# Altium PCB HLK_RM60_KIT_V1.1.PcbDoc (part 2 of 2)
Units mm, origin at the board's own origin, x right, y up, seen from the top; angles counter-clockwise.
Board outline 140 x 100 mm, 2 copper layers (Top, Bottom), stack 0.29 mm thick; 133 components, 198 nets, 607 pads, 989 vias.
Unrouted connection lines stored in the file: 4.
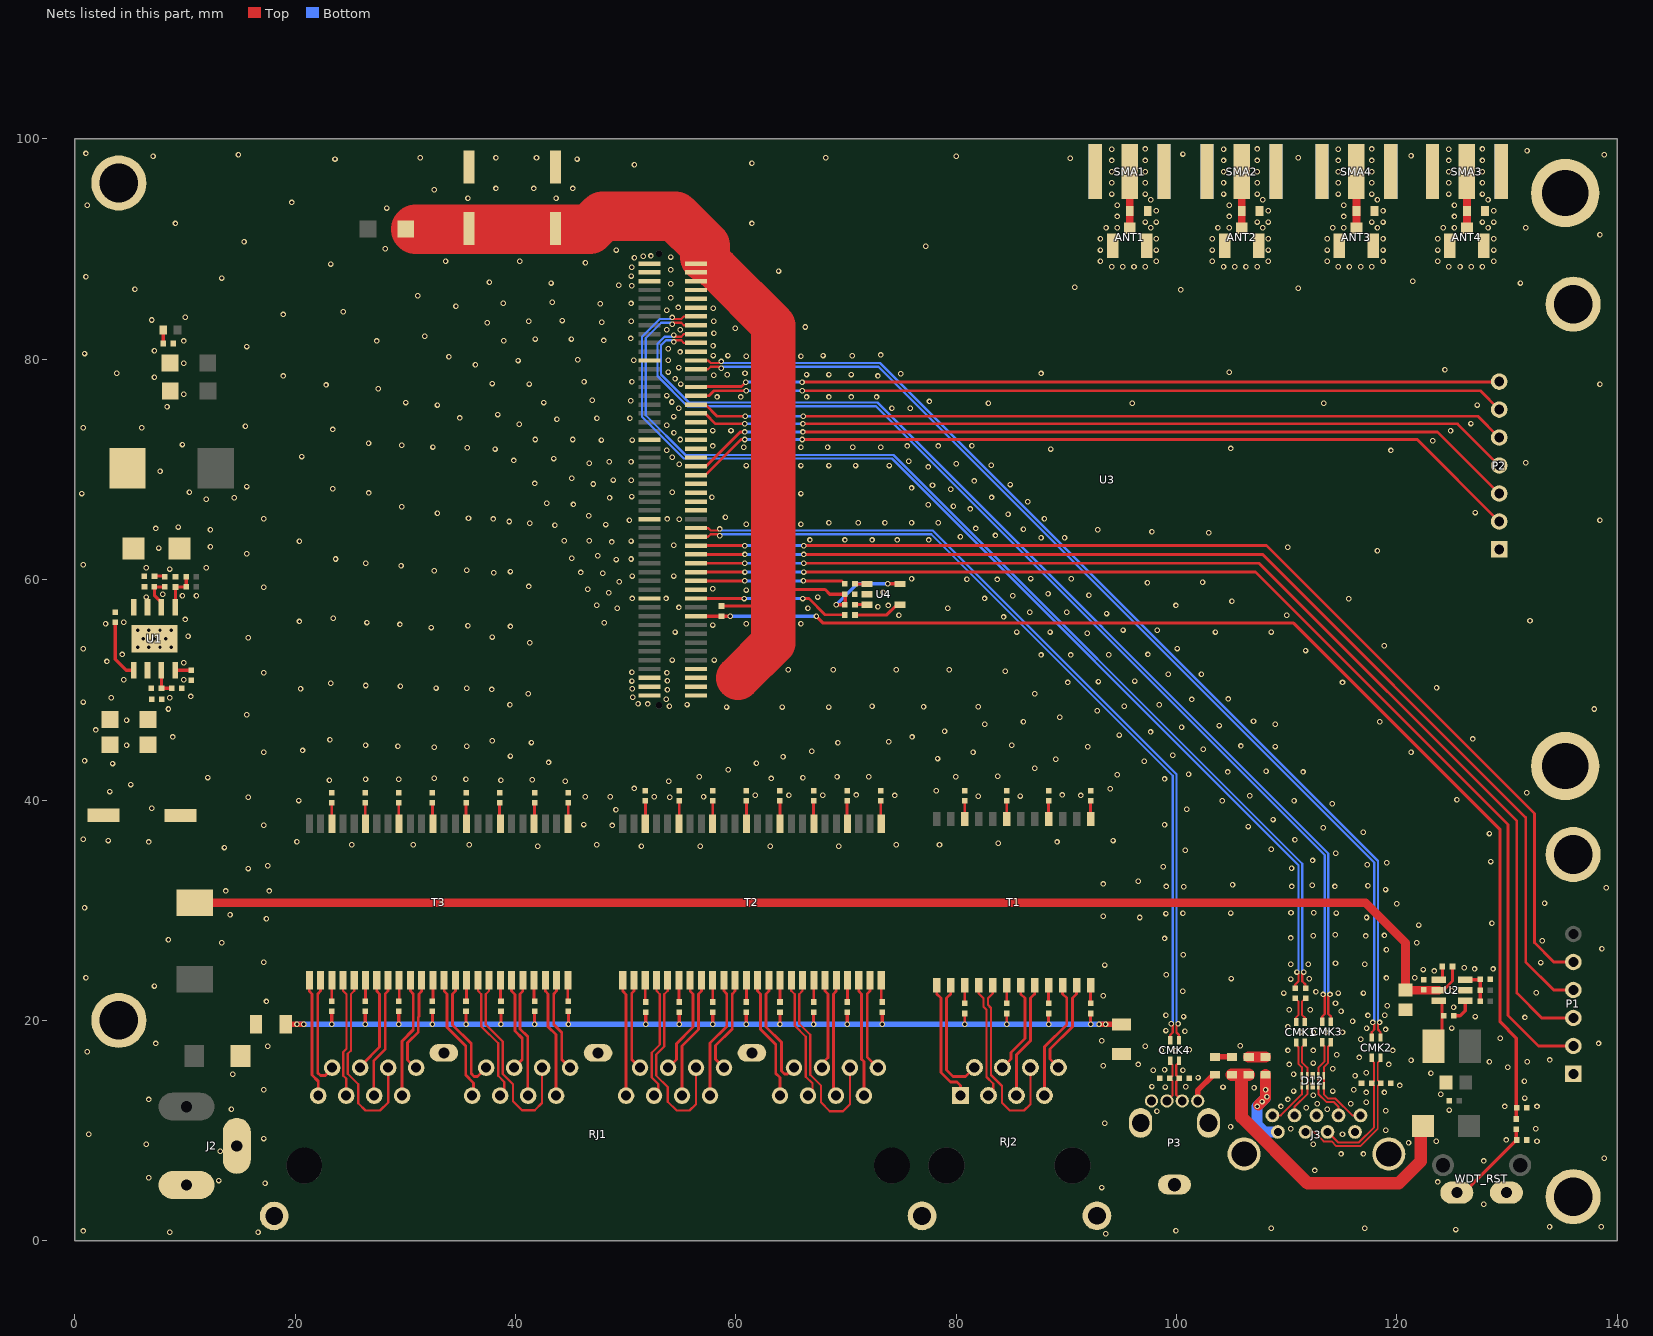
[diagram p2: the nets of this part, all layers, seen from the top]

## Via types
v1: diameter 0.5, hole 0.3, Top to Bottom, tented both sides, 989 vias

## Nets (pads, with @x,y where several pads share a name; then routed paths per layer and width w, separated by ;. In a path a pad name is that pad's centre, name@x,y a point inside that pad or via, vN(x,y) a via of type N, cw(c..) or ccw(c..) an arc to the next point about the centre after c; other vN are vias at no path point) (continued)
GND: ANT1.2 ANT1.3 ANT2.2 ANT2.3 ANT3.2 ANT3.3 ANT4.2 ANT4.3 C1.1 C2.1 C3.1 C4.1 C5.2 C6.1 C7.1 C8.1 C9.1 C10.1 C11.1 C12.1 C13.1 C14.1 C15.1 C16.1 C17.1 C18.1 C19.1 C20.1 C21.1 C22.2 C24.1 C25.1 C26.1 C27.2 C28.2 C29.2 C30.1 C33.1 C34.1 C35.2 C36.2 C38.1 C39.2 C41.1 C42.2 C45.1 D1.1 D3.1 D4.1 D6.1 D8.1 D9.1 D10.1 D11.1 D12.3 D12.8 D13.1 D14.1 D15.1 J2.2 J2.3 J3.4 J3.7 J3.10 J3.11 K1.0 K2.0 K3.0 K4.0 K5.0 P1.1 P2.1 P3.4 P3.5 P3.6 P3.7 R26.1 R27.1 R28.1 R29.2 R34.1 RJ1.EH RJ2.0 SMA1.2 SMA1.3 SMA2.2 SMA2.3 SMA3.2 SMA3.3 SMA4.2 SMA4.3 U1.7 U1.9 U2.2 U3.0@135.276,43.088 U3.0@135.276,95.088 U3.2 U3.4 U3.6 U3.11 U3.21 U3.24 U3.42 U3.60 U3.78 U3.96 U3.98 U3.100 U4.2 WDT_RST.1
  other v1: 93.574,0.635 8.636,0.762 16.637,0.762 0.762,0.889 99.949,0.914 125.349,1.016 108.585,1.143 117.094,1.143 133.858,1.27 138.557,1.27 127.889,3.302 93.218,4.826 17.272,5.207 123.698,5.334 13.081,5.461 6.731,5.715 112.547,6.375 127.889,7.239 138.811,7.493 114.935,7.874 116.967,7.874 13.208,8.128 6.477,8.763 112.395,8.763 121.056,8.89 123.571,9.017 132.715,9.017 129.921,9.144 17.145,9.271 1.27,9.652 115.062,9.652 118.999,10.033 110.363,10.16 132.588,10.16 104.902,10.338 93.472,10.668 98.222,11.76 118.999,11.811 124.739,11.862 14.224,11.938 113.665,11.938 111.76,12.065 109.474,12.192 129.794,12.192 132.715,12.192 112.776,12.446 115.824,12.446 117.221,12.573 6.731,12.827 110.109,12.827 131.597,12.954 112.395,13.208 123.977,13.284 117.221,13.462 118.872,13.462 110.617,13.589 114.173,13.589 17.145,13.716 116.078,13.716 107.036,13.894 98.984,13.945 104.216,13.945 100.838,13.97 97.765,13.995 120.269,14.097 131.572,14.478 101.956,14.808 116.205,14.986 14.351,15.113 110.617,15.113 123.088,15.189 117.221,15.24 97.892,15.469 100.584,15.469 98.908,15.519 114.173,15.621 130.048,15.748 93.345,15.875 96.52,16.002 110.236,16.002 119.253,16.002 112.395,16.129 128.397,16.256 131.826,16.256 121.285,16.383 133.883,16.408 116.586,16.637 114.554,16.891 1.143,17.145 99.873,17.247 110.109,17.272 112.395,17.272 119.634,17.272 98.603,17.297 101.168,17.323 17.526,17.653 97.155,17.653 105.791,17.704 7.366,17.907 138.303,17.907 93.218,18.161 116.713,18.288 129.388,18.364 111.252,18.923 112.395,18.923 113.538,18.923 115.062,18.923 100.762,19.025 99.035,19.075 118.974,19.177 117.246,19.279 124.968,19.304 110.109,19.431 115.976,19.914 131.623,20.269 100.635,20.345 127.102,20.345 117.373,20.447 99.035,20.472 118.897,20.472 114.935,20.828 110.236,20.955 112.141,20.955 125.141,21.183 119.126,21.336 114.427,21.565 17.399,21.717 93.345,22.225 109.728,22.479 114.681,22.479 116.967,22.479 132.639,22.504 112.649,22.606 100.559,22.631 124.991,22.708 7.239,23.114 110.363,23.749 112.039,23.774 104.953,23.8 119.05,23.851 1.016,23.876 121.615,23.876 99.06,24.13 123.393,24.486 122.403,24.613 127.051,24.663 128.727,24.663 126.111,24.765 93.472,25.019 110.363,25.095 111.963,25.095 117.069,25.095 114.427,25.197 133.045,25.248 17.145,25.273 100.609,25.959 119.05,26.416 138.608,26.492 13.335,27.051 121.793,27.051 133.198,27.229 8.509,27.305 98.908,27.432 110.363,27.483 117.17,27.661 112.395,27.686 118.872,27.711 114.402,27.762 121.996,28.651 128.626,28.804 17.399,29.21 96.647,29.337 117.246,29.337 93.345,29.464 14.097,29.591 99.035,29.693 100.584,29.718 104.927,29.743 114.503,29.743 110.388,29.769 112.446,29.769 0.889,30.226 119.99,30.582 133.401,30.632 13.716,31.75 17.653,31.75 118.974,31.877 138.989,32.029 100.66,32.131 99.06,32.156 110.465,32.156 114.376,32.156 117.373,32.207 112.319,32.258 105.08,32.309 93.345,32.385 96.52,32.639 15.748,33.782 110.439,33.807 98.806,33.934 17.526,34.036 117.297,34.138 119.075,34.315 128.524,34.417 112.344,34.519 114.452,35.179 100.787,35.433 108.585,35.535 13.589,35.687 42.037,35.814 51.435,35.814 56.769,35.814 63.119,35.814 69.342,35.814 25.146,35.941 30.734,35.941 35.814,35.941 47.371,35.941 74.549,35.941 78.486,35.941 83.82,36.068 6.731,36.195 89.154,36.195 20.168,36.22 3.048,36.322 94.234,36.322 110.744,36.398 0.762,36.449 128.397,36.957 116.942,37.084 113.309,37.49 106.502,37.592 48.793,37.694 17.145,37.719 98.908,37.744 46.203,37.77 108.763,38.227 49.124,39.116 100.94,39.167 6.985,39.243 114.122,39.649 104.14,39.929 110.668,39.929 20.345,39.954 125.451,40.03 15.748,40.259 54,40.259 48.616,40.284 52.603,40.284 46.33,40.31 57.074,40.31 82.017,40.335 85.827,40.361 106.655,40.386 74.422,40.411 91.313,40.411 61.773,40.437 64.821,40.437 67.894,40.437 70.917,40.462 89.637,40.462 131.775,40.665 3.175,40.767 78.181,40.843 93.98,41.021 50.775,41.046 5.08,41.402 44.526,41.707 53.924,41.707 23.114,41.783 38.684,41.783 41.529,41.834 26.391,41.885 29.413,41.885 35.509,41.885 98.908,41.91 63.221,41.961 32.639,41.986 66.091,42.012 12.065,42.037 56.667,42.113 69.19,42.113 72.06,42.113 79.959,42.113 83.769,42.164 94.615,42.291 101.092,42.342 104.648,42.545 111.481,42.545 108.128,42.621 59.309,42.748 87.122,42.875 3.429,43.307 61.874,43.332 43.002,43.409 97.079,43.51 0.889,43.561 89.027,43.688 78.308,43.764 64.287,43.917 39.548,43.993 99.644,44.069 17.145,44.323 121.285,44.323 81.534,44.348 66.904,44.425 20.676,44.501 102.413,44.602 32.639,44.78 91.948,44.831 108.966,44.856 29.337,44.882 35.585,44.882 105.842,44.907 4.699,44.958 26.391,44.958 85.039,44.958 69.266,45.187 41.453,45.212 73.889,45.288 37.897,45.39 23.165,45.466 126.873,45.542 8.89,45.72 75.997,45.72 94.793,45.898 97.638,46.177 78.943,46.253 1.905,46.355 100.457,46.609 103.886,46.761 108.966,46.863 82.601,46.888 86.106,47.092 118.44,47.117 106.985,47.142 4.699,47.244 89.408,47.498 15.621,47.752 92.812,48.108 8.509,48.26 137.922,48.26 59.157,48.438 64.211,48.438 68.428,48.438 77.038,48.463 81.991,48.463 53.975,48.514 72.365,48.514 95.25,48.514 39.497,48.641 98.425,48.641 55.575,48.666 52.019,48.717 51.13,48.743 0.762,48.895 101.371,49.124 53.696,49.149 104.699,49.174 3.302,49.276 8.636,49.276 50.648,49.327 10.541,49.403 41.173,49.632 87.122,49.657 53.797,50.013 37.846,50.038 20.498,50.089 50.597,50.089 35.585,50.14 32.791,50.165 123.596,50.19 29.566,50.317 26.416,50.394 23.241,50.597 90.119,50.673 115.062,50.673 92.913,50.749 50.571,50.8 96.215,50.8 53.797,50.825 4.445,50.927 9.906,50.927 99.238,51.41 102.26,51.41 17.145,51.562 53.746,51.562 50.571,51.587 84.455,51.689 64.77,51.816 68.834,51.816 74.549,51.816 79.375,51.816 9.906,52.451 2.921,52.578 54.229,52.705 58.039,52.705 87.706,53.162 90.399,53.162 93.853,53.188 4.318,53.213 97.409,53.213 111.709,53.569 0.762,53.721 100.076,53.746 118.847,54 41.3,54.28 15.748,54.737 37.897,54.788 10.287,54.864 91.897,55.143 54.483,55.245 85.496,55.245 88.519,55.245 103.53,55.245 108.585,55.245 98.247,55.397 95.148,55.423 32.36,55.651 39.548,55.753 35.687,55.804 57.912,55.88 29.515,55.931 2.794,56.007 60.96,56.007 65.913,56.007 48.057,56.083 26.518,56.109 4.445,56.134 20.396,56.21 132.08,56.261 10.033,56.388 23.47,56.49 84.303,56.617 74.803,56.769 110.007,56.769 93.65,56.921 86.665,57.048 90.043,57.048 49.251,57.404 66.548,57.404 79.223,57.404 54.839,57.48 72.898,57.531 73.838,57.658 99.949,57.658 47.371,57.683 105.029,58.039 115.621,58.268 50.597,58.293 53.67,58.293 82.575,58.293 6.477,58.42 67.437,58.42 9.779,58.547 11.049,58.547 85.141,58.547 92.05,58.598 8.001,58.674 88.341,58.725 48.463,58.801 73.355,58.852 60.96,59.055 46.558,59.131 57.912,59.182 17.145,59.309 41.199,59.385 97.358,59.715 102.362,59.766 49.428,59.817 83.718,60.02 80.975,60.046 75.946,60.071 90.449,60.071 86.766,60.096 50.597,60.325 54.356,60.325 47.93,60.579 38.024,60.63 45.923,60.655 39.548,60.731 32.639,60.808 35.585,60.858 8.636,60.96 6.477,61.087 11.938,61.087 29.616,61.265 0.762,61.341 26.416,61.493 49.149,61.824 23.673,61.874 50.495,61.874 45.11,61.951 47.473,62.179 15.621,62.357 118.237,62.611 7.62,62.865 110.084,62.941 12.319,62.992 54.356,63.119 48.743,63.424 20.396,63.475 50.495,63.5 44.425,63.525 46.685,63.525 66.726,63.602 69.901,63.602 72.365,63.602 74.651,63.602 77.521,63.602 87.706,63.805 89.84,63.805 80.391,63.881 83.566,64.008 102.921,64.262 97.765,64.338 12.319,64.516 92.862,64.541 86.106,64.567 7.366,64.643 81.788,64.643 9.398,64.77 43.586,64.948 48.184,64.999 60.96,65.024 65.913,65.024 41.3,65.126 68.453,65.151 71.12,65.151 73.533,65.151 75.946,65.151 78.359,65.151 39.446,65.278 50.343,65.38 138.43,65.405 54.864,65.481 37.973,65.507 53.772,65.507 17.145,65.532 88.011,65.532 35.738,65.583 59.055,65.659 46.66,65.786 84.709,65.938 32.918,66.015 127.102,66.091 81.28,66.421 29.667,66.624 79.756,66.675 77.47,66.802 45.263,66.827 42.85,66.929 86.487,67.081 11.938,67.31 14.478,67.437 48.539,67.437 83.21,67.462 57.836,67.488 50.546,67.539 0.635,67.818 65.913,67.818 26.695,67.869 10.414,67.945 54.229,67.945 79.502,68.199 23.419,68.25 75.946,68.326 15.621,68.453 77.851,68.58 84.912,68.631 47.066,68.682 41.758,68.732 81.636,68.961 50.521,69.012 48.87,69.037 45.11,69.19 7.747,69.85 77.47,70.231 60.96,70.358 65.913,70.358 68.453,70.358 70.866,70.358 73.914,70.358 83.185,70.383 54.864,70.485 80.01,70.51 46.685,70.561 131.699,70.612 48.514,70.714 50.495,70.714 75.692,70.739 39.853,70.815 43.485,70.993 54.229,71.12 20.599,71.171 119.456,71.73 53.721,71.755 38.151,71.857 88.57,71.857 104.927,71.907 35.636,71.984 60.706,72.009 65.913,72.009 68.326,72.009 70.612,72.009 73.152,72.009 32.512,72.034 57.912,72.136 75.565,72.136 78.384,72.136 81.432,72.161 29.693,72.212 9.779,72.263 26.67,72.39 123.241,72.593 47.803,72.669 50.597,72.669 41.808,72.72 45.187,72.72 54.966,72.72 54.381,73.33 124.866,73.508 57.912,73.533 59.563,73.533 23.419,73.635 0.762,73.787 6.096,73.787 15.494,73.914 53.721,74.016 40.335,74.117 126.721,74.168 43.764,74.549 47.396,74.651 50.394,74.651 34.95,74.676 54.356,74.803 38.379,74.981 54.813,75.565 74.168,75.565 75.819,75.565 8.382,75.692 32.918,75.844 127.305,75.844 82.931,76.022 95.987,76.022 113.36,76.022 30.048,76.073 42.57,76.073 54.204,76.124 77.572,76.175 50.47,76.225 46.965,76.276 58.293,76.581 60.452,76.581 66.421,76.581 68.453,76.581 70.485,76.581 72.771,76.581 53.721,76.708 9.906,76.835 27.534,77.318 22.809,77.673 138.43,77.724 41.25,77.749 54.991,77.749 37.897,77.8 46.228,77.953 50.571,77.953 54.483,78.232 7.239,78.359 18.923,78.486 72.898,78.486 57.988,78.562 59.233,78.588 66.421,78.613 68.453,78.613 70.485,78.613 74.981,78.689 87.706,78.715 3.81,78.74 60.833,78.74 104.775,78.816 53.873,78.842 124.358,79.045 54.813,79.248 36.373,79.502 9.906,79.629 40.234,79.883 50.749,79.908 53.873,79.908 45.644,79.959 33.96,80.239 60.96,80.264 65.913,80.264 70.561,80.315 57.963,80.34 59.284,80.34 67.92,80.34 73.152,80.391 0.889,80.518 54.94,80.67 7.239,80.772 53.873,80.95 15.621,81.153 57.937,81.229 9.906,81.661 27.407,81.661 38.938,81.686 48.006,81.712 41.808,81.839 45.085,81.839 50.47,81.89 31.775,82.093 58.014,82.372 53.721,82.677 54.966,82.677 59.944,82.804 66.294,82.931 37.44,83.312 47.828,83.363 41.199,83.439 57.988,83.439 50.521,83.464 44.247,83.515 6.985,83.566 10.033,83.82 18.923,84.074 24.384,84.328 53.721,84.455 57.963,84.633 54.788,84.709 34.595,84.811 47.701,85.039 50.495,85.065 38.887,85.09 43.332,85.166 54.102,85.598 31.14,85.776 100.381,86.309 5.461,86.36 111.049,86.436 90.754,86.538 50.546,86.665 49.378,86.716 54.102,86.868 43.231,86.919 131.216,86.919 37.643,86.995 121.437,87.071 13.335,87.376 1.016,87.503 50.521,87.554 63.881,88.011 54.102,88.138 50.546,88.367 94.107,88.392 95.123,88.392 96.139,88.392 97.155,88.392 104.267,88.392 105.283,88.392 106.299,88.392 107.315,88.392 114.681,88.392 115.697,88.392 116.713,88.392 117.729,88.392 124.714,88.392 125.73,88.392 126.746,88.392 127.762,88.392 23.241,88.646 46.355,88.773 33.655,88.9 40.386,88.9 93.091,88.9 98.171,88.9 103.251,88.9 108.331,88.9 113.665,88.9 118.745,88.9 123.698,88.9 128.778,88.9 50.8,89.205 54.102,89.281 51.587,89.357 52.299,89.383 49.149,89.916 93.091,89.916 98.171,89.916 103.251,89.916 108.331,89.916 113.665,89.916 118.745,89.916 123.698,89.916 128.778,89.916 28.194,90.043 77.241,90.246 15.367,90.678 93.091,90.932 98.171,90.932 103.251,90.932 108.331,90.932 113.665,90.932 118.745,90.932 123.698,90.932 128.778,90.932 138.43,91.313 93.599,91.948 94.615,91.948 97.663,91.948 103.759,91.948 104.775,91.948 107.823,91.948 114.173,91.948 115.189,91.948 118.237,91.948 124.206,91.948 125.222,91.948 128.27,91.948 131.699,91.948 9.144,92.329 61.468,92.329 97.155,92.456 98.171,92.456 107.315,92.456 108.331,92.456 117.729,92.456 118.745,92.456 127.762,92.456 128.778,92.456 94.615,92.964 104.775,92.964 115.189,92.964 125.222,92.964 98.171,93.472 108.331,93.472 118.745,93.472 128.778,93.472 28.321,93.726 1.143,93.98 94.615,93.98 104.775,93.98 115.189,93.98 125.222,93.98 19.685,94.234 97.663,94.488 107.823,94.488 118.237,94.488 128.27,94.488 35.687,94.615 43.688,94.615 94.107,94.996 97.155,94.996 104.267,94.996 107.315,94.996 114.681,94.996 117.729,94.996 124.714,94.996 127.762,94.996 32.639,95.377 38.227,95.504 41.656,95.504 45.212,95.504 94.107,96.012 97.155,96.012 104.267,96.012 107.315,96.012 114.681,96.012 117.729,96.012 124.714,96.012 127.762,96.012 94.107,97.028 97.155,97.028 104.267,97.028 107.315,97.028 114.681,97.028 117.729,97.028 124.714,97.028 127.762,97.028 50.8,97.663 61.468,97.79 94.107,98.044 97.155,98.044 104.267,98.044 107.315,98.044 114.681,98.044 117.729,98.044 124.714,98.044 127.762,98.044 23.622,98.171 45.593,98.171 90.348,98.247 31.369,98.298 38.227,98.298 41.91,98.298 68.174,98.298 111.049,98.298 7.112,98.425 80.01,98.425 121.285,98.476 14.859,98.552 138.811,98.552 100.584,98.628 1.016,98.679 131.81,98.933 94.107,99.06 104.267,99.06 114.681,99.06 124.714,99.06 97.155,99.088 107.315,99.088 117.729,99.088 127.762,99.088
I2C_SCLK: U3.75
I2C_SDA: R31.1 U3.77 | length 14.1
  Top w0.254: U3.77@56.376,58.288 v1(60.762,58.288) ; v1(66.086,58.288) 66.629,58.288 68.097,56.82 R31.1@69.875,56.82
  Bottom w0.254: v1(60.762,58.288) v1(66.086,58.288)
MTXVN_A: RJ2.2 T1.14 | length 11
  Top w0.254: T1.14@79.502,23.184 79.502,22.407 79.121,22.026 79.121,15.494 79.705,14.91 80.849,14.91 RJ2.2@81.661,15.722
MTXVN_A_P0: RJ1.A2 T3.26 | length 10.3
  Top w0.254: T3.26@22.31,23.634 22.31,22.657 22.054,22.401 22.054,15.24 22.308,14.986 22.733,14.986 23.368,15.621 RJ1.A2@23.368,15.707
MTXVN_A_P1: RJ1.B2 T3.38 | length 11.1
  Top w0.254: T3.38@34.55,23.634 34.55,22.657 34.294,22.401 34.294,19.583 35.992,17.886 35.992,15.164 36.236,14.92 36.551,14.92 RJ1.B2@37.338,15.707
MTXVN_A_P2: RJ1.C2 T2.26 | length 8.3
  Top w0.254: T2.26@50.758,23.634 50.758,22.657 50.546,22.445 50.546,16.469 RJ1.C2@51.308,15.707
MTXVN_A_P3: RJ1.D2 T2.38 | length 10.4
  Top w0.254: T2.38@62.998,23.634 62.998,22.657 62.742,22.401 62.742,19.406 64.135,18.013 64.135,15.4 64.412,15.123 64.694,15.123 RJ1.D2@65.278,15.707
MTXVN_B: RJ2.6 T1.17 | length 17.8
  Top w0.203: T1.17@83.312,23.184 83.312,22.432 82.88,22.001 82.88,21.412 83.16,21.133 83.16,15.037 84.15,14.046 84.15,12.522 84.861,11.811 86.157,11.811 86.741,12.395 RJ2.6@86.741,15.722
MTXVN_B_P0: RJ1.A6 T3.29 | length 18.3
  Top w0.203: T3.29@25.37,23.634 25.37,22.682 25.063,22.376 25.063,17.249 24.778,16.965 24.778,15.15 25.73,14.199 25.73,12.471 26.391,11.811 27.711,11.811 28.448,12.548 RJ1.A6@28.448,15.707
MTXVN_B_P1: RJ1.B6 T3.41 | length 18.6
  Top w0.203: T3.41@37.61,23.634 37.61,22.682 37.303,22.376 37.303,19.618 38.837,18.085 38.837,15.138 39.776,14.199 39.776,12.649 40.589,11.836 41.758,11.836 42.418,12.497 RJ1.B6@42.418,15.707
MTXVN_B_P2: RJ1.C6 T2.29 | length 18.3
  Top w0.203: T2.29@53.818,23.634 53.818,22.682 53.511,22.376 53.511,17.63 52.781,16.9 52.781,14.986 53.823,13.945 53.823,12.624 54.635,11.811 55.804,11.811 56.388,12.395 RJ1.C6@56.388,15.707
MTXVN_B_P3: RJ1.D6 T2.41 | length 18.6
  Top w0.203: T2.41@66.058,23.634 66.058,22.682 65.751,22.376 65.751,19.694 66.751,18.694 66.751,15.062 67.742,14.072 67.742,12.548 68.529,11.76 69.723,11.76 70.358,12.395 RJ1.D6@70.358,15.707
MTXVN_C: RJ2.5 T1.20 | length 10.7
  Top w0.254: RJ2.5@85.471,13.182 85.471,16.884 86.741,18.154 86.741,22.026 87.122,22.407 T1.20@87.122,23.184
MTXVN_C_P0: RJ1.A5 T3.32 | length 11
  Top w0.254: RJ1.A5@27.178,13.167 27.131,13.214 27.131,16.329 28.174,17.372 28.174,22.401 28.43,22.657 T3.32@28.43,23.634
MTXVN_C_P1: RJ1.B5 T3.44 | length 10.9
  Top w0.254: T3.44@40.67,23.634 40.67,22.657 40.414,22.401 40.414,19.225 41.123,18.517 41.123,13.192 RJ1.B5@41.148,13.167
MTXVN_C_P2: RJ1.C5 T2.32 | length 11.2
  Top w0.254: RJ1.C5@55.118,13.167 55.118,17.671 56.622,19.175 56.622,22.401 56.878,22.657 T2.32@56.878,23.634
MTXVN_C_P3: RJ1.D5 T2.44 | length 10.7
  Top w0.254: RJ1.D5@69.088,13.167 68.862,13.393 68.862,22.401 69.118,22.657 T2.44@69.118,23.634
MTXVN_D: RJ2.8 T1.23 | length 8.8
  Top w0.254: RJ2.8@89.281,15.722 88.519,16.484 88.519,17.392 90.551,19.424 90.551,22.026 90.932,22.407 T1.23@90.932,23.184
MTXVN_D_P0: RJ1.A8 T3.35 | length 8.8
  Top w0.254: RJ1.A8@30.988,15.707 30.902,15.707 30.201,16.408 30.201,17.972 31.183,18.954 31.183,20.287 31.234,20.338 31.234,22.401 31.49,22.657 T3.35@31.49,23.634
MTXVN_D_P1: RJ1.B8 T3.47 | length 8.7
  Top w0.254: T3.47@43.73,23.634 43.73,22.657 43.474,22.401 43.474,19.634 44.196,18.912 44.196,16.434 44.923,15.707 RJ1.B8@44.958,15.707
MTXVN_D_P2: RJ1.C8 T2.35 | length 9
  Top w0.254: RJ1.C8@58.928,15.707 58.166,16.469 58.166,17.722 59.682,19.238 59.682,22.401 59.938,22.657 T2.35@59.938,23.634
MTXVN_D_P3: RJ1.D8 T2.47 | length 8.4
  Top w0.254: T2.47@72.178,23.634 72.178,22.657 71.922,22.401 71.922,16.683 RJ1.D8@72.898,15.707
MTXVP_A: RJ2.1 T1.13 | length 11.2
  Top w0.254: T1.13@78.232,23.184 78.232,22.407 78.613,22.026 78.613,15.284 79.495,14.402 80.086,14.402 80.391,14.097 RJ2.1@80.391,13.182
MTXVP_A_P0: RJ1.A1 T3.25 | length 10.8
  Top w0.254: T3.25@21.29,23.634 21.29,22.657 21.546,22.401 21.546,15.03 22.098,14.478 RJ1.A1@22.098,13.167
MTXVP_A_P1: RJ1.B1 T3.37 | length 11.6
  Top w0.254: T3.37@33.53,23.634 33.53,22.657 33.786,22.401 33.786,19.373 35.484,17.675 35.484,15.03 36.191,14.322 36.191,13.29 RJ1.B1@36.068,13.167
MTXVP_A_P2: RJ1.C1 T2.25 | length 10.6
  Top w0.254: T2.25@49.738,23.634 49.738,22.657 50.038,22.357 RJ1.C1@50.038,13.167
MTXVP_A_P3: RJ1.D1 T2.37 | length 11.3
  Top w0.254: T2.37@61.978,23.634 61.978,22.657 62.234,22.401 62.234,19.195 63.627,17.802 63.627,15.189 64.008,14.808 RJ1.D1@64.008,13.167
MTXVP_B: RJ2.3 T1.16 | length 10.5
  Top w0.203: T1.16@82.042,23.184 82.042,22.432 82.474,22.001 82.474,21.244 82.753,20.964 82.753,14.868 83.363,14.259 RJ2.3@83.363,13.259
MTXVP_B_P0: RJ1.A3 T3.28 | length 10.8
  Top w0.203: T3.28@24.35,23.634 24.35,22.682 24.657,22.376 24.657,17.418 24.372,17.133 24.372,14.982 24.638,14.716 RJ1.A3@24.638,13.167
MTXVP_B_P1: RJ1.B3 T3.40 | length 11
  Top w0.203: T3.40@36.59,23.634 36.59,22.682 36.897,22.376 36.897,19.45 38.43,17.916 38.43,14.97 38.989,14.411 RJ1.B3@38.989,13.665
MTXVP_B_P2: RJ1.C3 T2.28 | length 10.7
  Top w0.203: T2.28@52.798,23.634 52.798,22.682 53.105,22.376 53.105,17.799 52.375,17.069 52.375,14.818 52.959,14.233 RJ1.C3@52.959,13.564
MTXVP_B_P3: RJ1.D3 T2.40 | length 11.2
  Top w0.203: T2.40@65.038,23.634 65.038,22.682 65.345,22.376 65.345,19.526 66.345,18.526 66.345,14.894 66.954,14.284 RJ1.D3@66.954,13.233
MTXVP_C: RJ2.4 T1.19 | length 8.5
  Top w0.254: RJ2.4@84.201,15.722 84.963,16.484 84.963,17.094 86.233,18.364 86.233,22.026 85.852,22.407 T1.19@85.852,23.184
MTXVP_C_P0: RJ1.A4 T3.31 | length 8.3
  Top w0.254: RJ1.A4@26.149,16.065 27.666,17.582 27.666,22.401 27.41,22.657 T3.31@27.41,23.634
MTXVP_C_P1: RJ1.B4 T3.43 | length 8.6
  Top w0.254: T3.43@39.65,23.634 39.65,22.657 39.957,22.35 39.957,19.036 40.615,18.378 40.615,16.444 RJ1.B4@39.878,15.707
MTXVP_C_P2: RJ1.C4 T2.31 | length 9
  Top w0.254: RJ1.C4@53.848,15.707 53.865,15.707 54.61,16.452 54.61,17.882 56.114,19.386 56.114,22.401 55.858,22.657 T2.31@55.858,23.634
MTXVP_C_P3: RJ1.D4 T2.43 | length 8.3
  Top w0.254: RJ1.D4@67.818,15.707 67.818,16.078 68.354,16.614 68.354,22.401 68.098,22.657 T2.43@68.098,23.634
MTXVP_D: RJ2.7 T1.22 | length 11
  Top w0.254: RJ2.7@88.011,13.182 88.011,17.602 90.043,19.634 90.043,22.026 89.662,22.407 T1.22@89.662,23.184
MTXVP_D_P0: RJ1.A7 T3.34 | length 11
  Top w0.254: RJ1.A7@29.718,13.167 29.693,13.192 29.693,18.11 30.726,19.144 30.726,22.401 30.47,22.657 T3.34@30.47,23.634
MTXVP_D_P1: RJ1.B7 T3.46 | length 10.9
  Top w0.254: T3.46@42.71,23.634 42.71,22.657 42.966,22.401 42.966,19.424 43.688,18.702 RJ1.B7@43.688,13.167
MTXVP_D_P2: RJ1.C7 T2.34 | length 11.2
  Top w0.254: RJ1.C7@57.658,13.167 57.658,17.932 59.174,19.448 59.174,22.401 58.918,22.657 T2.34@58.918,23.634
MTXVP_D_P3: RJ1.D7 T2.46 | length 10.7
  Top w0.254: T2.46@71.158,23.634 71.158,22.657 71.414,22.401 71.414,16.473 71.628,16.259 RJ1.D7@71.628,13.167
ND_ALE: U3.57
ND_CLE: U3.53
ND_CS_N: P2.2 U3.49 | length 77.3
  Top w0.254: U3.49@56.376,69.488 57.245,69.488 60.477,72.72 v1(60.808,72.72) ; v1(66.04,72.72) 121.844,72.72 P2.2@129.235,65.329
  Bottom w0.254: v1(60.808,72.72) v1(66.04,72.72)
ND_D0: U3.43
ND_D1: U3.41
ND_D2: U3.39
ND_D3: U3.37
ND_D4: P2.4 U3.35 | length 74.8
  Top w0.254: U3.35@56.376,75.088 57.221,75.088 58.166,74.143 v1(60.808,74.143) ; v1@66.116,74.168 v1(66.091,74.143) 125.501,74.143 P2.4@129.235,70.409
  Bottom w0.254: v1(60.808,74.143) v1(66.091,74.143)
ND_D5: P2.5 U3.33 | length 74.1
  Top w0.254: U3.33@56.376,75.888 57.233,75.888 58.293,74.828 v1(60.858,74.828) ; v1(66.116,74.828) 127.356,74.828 P2.5@129.235,72.949
  Bottom w0.254: v1(60.858,74.828) v1(66.116,74.828)
ND_D6: P2.6 U3.31 | length 73.7
  Top w0.254: U3.31@56.376,76.688 57.562,76.688 58.014,77.14 v1(60.935,77.14) ; v1(66.04,77.14) 127.584,77.14 P2.6@129.235,75.489
  Bottom w0.254: v1(60.935,77.14) v1(66.04,77.14)
ND_D7: P2.7 U3.29 | length 72.9
  Top w0.254: U3.29@56.376,77.488 56.376,77.521 60.503,77.521 v1(60.909,77.927) ; v1(66.015,77.927) P2.7@129.083,77.927
  Bottom w0.254: v1(60.909,77.927) v1(66.015,77.927)
ND_RB_N: U3.45
ND_RE_N: P2.3 U3.47 | length 76.4
  Top w0.254: U3.47@56.376,70.288 57.283,70.288 60.401,73.406 v1(60.808,73.406) ; v1(66.091,73.406) 123.698,73.406 P2.3@129.235,67.869
  Bottom w0.254: v1(60.808,73.406) v1(66.091,73.406)
ND_WE_N: U3.55
ND_WP: U3.51
NetANT1_1: ANT1.1 D6.2 SMA1.1 | length 5.1
  Top w0.7: SMA1.1@95.742,97.028 95.758,97.012 D6.2@95.758,93.472 ANT1.1@95.758,91.897
NetANT2_1: ANT2.1 D11.2 SMA2.1 | length 5.1
  Top w0.7: SMA2.1@105.902,97.028 105.918,97.012 D11.2@105.918,93.472 ANT2.1@105.918,91.897
NetANT3_1: ANT3.1 D10.2 SMA4.1 | length 5.1
  Top w0.7: SMA4.1@116.316,97.028 116.332,97.012 D10.2@116.332,93.472 ANT3.1@116.332,91.897
NetANT4_1: ANT4.1 D9.2 SMA3.1 | length 5.1
  Top w0.7: SMA3.1@126.349,97.028 126.365,97.012 D9.2@126.365,93.472 ANT4.1@126.365,91.897
NetC1_2: C1.2 T1.1 | length 1.5
  Top w0.254: T1.1@92.202,38.284 C1.2@92.202,39.736
NetC2_2: C2.2 T1.4 | length 1.5
  Top w0.254: T1.4@88.392,38.284 C2.2@88.392,39.736
NetC3_2: C3.2 T1.7 | length 1.5
  Top w0.254: T1.7@84.582,38.284 C3.2@84.582,39.736
NetC4_2: C4.2 T1.10 | length 1.5
  Top w0.254: T1.10@80.772,38.284 C4.2@80.772,39.736
NetC5_1: C5.1 C22.1 R1.1 R2.1 R3.1 R4.1 R6.1 R7.1 R8.1 R9.1 R10.1 R11.1 R12.1 R13.1 R14.1 R15.1 R16.1 R17.1 R18.1 R19.1 R20.1 R21.1 | length 96
  Top w0.254: v1(80.772,19.647) R4.1@80.772,20.625 ; v1(84.582,19.647) R3.1@84.582,20.625 ; v1(88.392,19.647) R2.1@88.392,20.625 ; v1(92.202,19.647) R1.1@92.202,20.625
  Top w0.3: v1(23.32,19.647) R21.1@23.32,20.62 ; v1(26.368,19.647) R20.1@26.368,20.62 ; v1(29.416,19.647) R19.1@29.416,20.62 ; v1(32.464,19.647) R18.1@32.464,20.62 ; v1(35.512,19.647) R17.1@35.512,20.62 ; v1(38.687,19.647) R16.1@38.687,20.62 ; v1(41.735,19.647) R15.1@41.735,20.62 ; v1(44.806,19.647) R14.1@44.806,20.62 ; v1(51.816,19.647) R13.1@51.816,20.559 ; v1(54.864,19.647) R12.1@54.864,20.559 ; v1(57.912,19.647) R11.1@57.912,20.559 ; v1(60.96,19.647) R10.1@60.96,20.559 ; v1(64.008,19.647) R9.1@64.008,20.559 ; v1(67.056,19.647) R8.1@67.056,20.559 ; v1(70.104,19.647) R7.1@70.104,20.559 ; v1(73.279,19.647) R6.1@73.279,20.559
  Top w0.5: C22.1@19.155,19.647 v1(20.168,19.647) v1(20.777,19.647) ; v1(92.964,19.647) v1(93.561,19.647) C5.1@94.987,19.647
  Bottom w0.5: v1(20.168,19.647) v1(20.777,19.647) v1(23.32,19.647) v1(26.368,19.647) v1(29.416,19.647) v1(32.464,19.647) v1(35.512,19.647) v1(38.687,19.647) v1(41.735,19.647) v1(44.806,19.647) v1(51.816,19.647) v1(54.864,19.647) v1(57.912,19.647) v1(60.96,19.647) v1(64.008,19.647) v1(67.056,19.647) v1(70.104,19.647) v1(73.279,19.647) v1(80.772,19.647) v1(84.582,19.647) v1(88.392,19.647) v1(92.202,19.647) v1(92.964,19.647) v1(93.561,19.647)
NetC6_2: C6.2 T2.1 | length 2.1
  Top w0.254: T2.1@73.152,37.88 C6.2@73.152,39.936
NetC7_2: C7.2 T2.4 | length 1.9
  Top w0.254: T2.4@70.104,37.868 C7.2@70.104,39.736
NetC8_2: C8.2 T2.7 | length 1.9
  Top w0.254: T2.7@67.056,37.856 C8.2@67.056,39.736
NetC9_2: C9.2 T2.10 | length 1.9
  Top w0.254: T2.10@64.008,37.844 C9.2@64.008,39.736
NetC10_2: C10.2 T2.13 | length 1.9
  Top w0.254: T2.13@60.96,37.836 C10.2@60.96,39.736
NetC11_2: C11.2 T2.16 | length 1.9
  Top w0.254: T2.16@57.912,37.848 C11.2@57.912,39.736
NetC12_2: C12.2 T2.19 | length 1.9
  Top w0.254: T2.19@54.864,37.86 C12.2@54.864,39.736
NetC13_2: C13.2 T2.22 | length 1.9
  Top w0.254: T2.22@51.791,37.847 C13.2@51.791,39.736
NetC14_2: C14.2 T3.1 | length 1.7
  Top w0.254: T3.1@44.783,37.867 C14.2@44.783,39.543
NetC15_2: C15.2 T3.4 | length 1.7
  Top w0.254: T3.4@41.735,37.879 C15.2@41.735,39.543
NetC16_2: C16.2 T3.7 | length 1.6
  Top w0.254: T3.7@38.56,37.904 C16.2@38.56,39.543
NetC17_2: C17.2 T3.10 | length 1.7
  Top w0.254: T3.10@35.512,37.892 C17.2@35.512,39.543
NetC18_2: C18.2 T3.13 | length 1.7
  Top w0.254: T3.13@32.464,37.88 C18.2@32.464,39.543
NetC19_2: C19.2 T3.16 | length 1.7
  Top w0.254: T3.16@29.416,37.868 C19.2@29.416,39.543
NetC20_2: C20.2 T3.19 | length 1.7
  Top w0.254: T3.19@26.368,37.856 C20.2@26.368,39.543
NetC21_2: C21.2 T3.22 | length 1.7
  Top w0.254: C21.2@23.32,39.543 23.33,39.533 T3.22@23.33,37.834
NetC23_1: C23.1 D1.2 L1.1 U1.8
NetC23_2: C23.2 U1.1 | length 5.4
  Top w0.3: C23.2@3.683,56.141 3.683,52.781 4.686,51.778 U1.1@5.334,51.778
NetC31_1: C31.1 R25.1 R27.2 U1.5 | length 3.7
  Top w0.3: U1.5@9.144,57.493 R27.2@9.144,59.334 C31.1@10.091,59.334 ; C31.1@10.109,59.367 R25.1@10.109,60.274 ; R25.1@10.135,60.274 R25.1@10.16,60.3
NetC32_1: C32.1 R28.2 | length 0.9
  Top w0.3: R28.2@7.239,60.325 8.07,60.325 C32.1@8.153,60.242
NetC32_2: C32.2 C33.2 U1.6 | length 3
  Top w0.3: U1.6@7.874,57.493 7.874,57.937 7.232,58.58 C33.2@7.232,59.334 8.146,59.334 C32.2@8.153,59.342
NetC34_2: C34.2 U1.4 | length 1.5
  Top w0.3: U1.4@9.144,51.778 10.586,51.778 C34.2@10.592,51.783
NetC37_1: C37.1 U2.1 | length 2.1
  Top w0.3: C37.1@125.139,20.426 125.735,20.426 126.191,20.883 U2.1@126.191,21.783
NetC37_2: C37.2 L2.1 U2.6 | length 3.3
  Top w0.254: L2.1@124.089,18.425 124.089,20.422 U2.6@124.089,21.717
NetC40_1: C40.1 R33.1 R34.2 U2.3 | length 3.3
  Top w0.3: U2.3@126.191,23.683 R34.2@127.493,23.683 ; C40.1@127.566,21.717 127.566,22.733 R34.2@127.566,23.742
NetC43_1: C43.1 CMK1.2 | length 2.4
  Top w0.178: C43.1@110.769,22.004 111.049,21.724 111.049,20.472 110.852,20.276 CMK1.2@110.852,19.848
NetC44_1: C44.1 CMK1.1 | length 2.4
  Top w0.178: CMK1.1@111.652,19.848 111.658,19.855 111.658,20.218 111.379,20.498 111.379,21.673 C44.1@111.709,22.004
NetCMK1_3: CMK1.3 D12.5 D12.6 J3.9 | length 8.4
  Top w0.178: J3.9@108.7,11.377 109.471,11.377 111.37,13.275 D12.6@111.37,14.079 D12.5@111.37,14.979 111.37,15.748 111.049,16.068 111.049,17.577 110.852,17.773 CMK1.3@110.852,17.998
NetCMK1_4: CMK1.4 D12.4 D12.7 J3.8 | length 7.4
  Top w0.178: J3.8@110.7,11.377 110.7,12.138 111.869,13.308 D12.7@111.869,14.079 D12.4@111.869,14.979 111.869,15.715 111.379,16.205 111.379,17.551 111.652,17.824 CMK1.4@111.652,17.998
NetCMK2_1: CMK2.1 D13.2 J3.3 | length 11.8
  Top w0.178: J3.3@113.7,9.877 114.661,8.915 116.535,8.915 117.932,10.312 117.932,14.072 D13.2@117.704,14.3 117.932,14.529 117.932,16.154 117.71,16.376 CMK2.1@117.71,16.601
NetCMK2_2: CMK2.2 D14.2 J3.2 | length 14.5
  Top w0.178: J3.2@111.7,9.877 112.475,9.877 113.341,9.01 114.078,9.01 114.503,8.585 116.672,8.585 118.262,10.176 118.262,14.046 D14.2@118.516,14.3 118.262,14.554 118.262,16.154 118.51,16.402 CMK2.2@118.51,16.601
NetCMK3_3: CMK3.3 D12.2 D12.9 J3.6 | length 8.1
  Top w0.178: CMK3.3@113.214,18.023 113.214,17.85 113.436,17.628 113.436,16.281 112.869,15.714 D12.2@112.869,14.979 D12.9@112.869,14.079 112.869,13.318 113.614,12.573 114.29,12.573 114.7,12.163 J3.6@114.7,11.377
NetCMK3_4: CMK3.4 D12.1 D12.10 J3.5 | length 9.1
  Top w0.178: CMK3.4@113.976,17.837 113.767,17.628 113.767,16.145 113.37,15.748 D12.1@113.37,14.979 D12.10@113.37,14.079 113.37,13.285 113.751,12.903 114.427,12.903 115.954,11.377 J3.5@116.7,11.377 ; CMK3.4@114.014,17.799 CMK3.4@114.014,18.023
NetCMK4_1: CMK4.1 D8.2 P3.3 | length 4.2
  Top w0.203: P3.3@99.124,12.69 99.644,13.211 99.644,14.478 D8.2@99.39,14.732 99.644,14.986 99.644,15.926 99.422,16.148 CMK4.1@99.422,16.347
NetCMK4_2: CMK4.2 D15.2 P3.2 | length 4.2
  Top w0.203: CMK4.2@100.222,16.347 100.222,16.199 99.974,15.951 99.974,15.011 D15.2@100.254,14.732 99.981,14.459 99.981,13.229 P3.2@100.521,12.69
NetD3_2: D3.2 R23.1 WDT_RST.2 | length 8.4
  Top w0.3: WDT_RST.2@125.436,4.363 126.08,4.363 D3.2@130.861,9.144 ; D3.2@130.835,9.169 R23.1@130.835,10.135
NetD5_2: D5.2 R29.1 | length 1.2
  Top w0.3: R29.1@8.037,81.443 D5.2@8.037,82.652
NetF1_1: F1.1 P3.1 | length 3
  Top w0.508: P3.1@101.92,12.69 101.92,13.63 F1.1@103.353,15.062
NetF1_2: F1.2 FB2.2 | length 1.5
  Top w0.508: F1.2@103.505,16.688 FB2.2@105.029,16.688
NetF2_1: F2.1 J3.1 | length 8.5
  Top w1.016: v1@107.442,12.319 v1(107.759,12.636) 108.077,12.954 108.077,13.081 v1(108.077,13.716) F2.1@108.077,15.062
  Bottom w1.016: v1@108.077,13.589 108.077,13.081 108.077,12.954 v1(107.759,12.636) v1(107.315,12.192) 107.315,10.541 107.979,9.877 J3.1@109.2,9.877
  other v1: 108.204,13.081
NetF2_2: F2.2 FB1.2 | length 1.5
  Top w1.016: FB1.2@106.553,16.688 F2.2@108.077,16.688
NetR1_2: R1.2 T1.24 | length 1.6
  Top w0.254: R1.2@92.202,21.605 T1.24@92.202,23.184
NetR2_2: R2.2 T1.21 | length 1.6
  Top w0.254: R2.2@88.392,21.605 T1.21@88.392,23.184
NetR3_2: R3.2 T1.18 | length 1.6
  Top w0.254: R3.2@84.582,21.605 T1.18@84.582,23.184
NetR4_2: R4.2 T1.15 | length 1.6
  Top w0.254: R4.2@80.772,21.605 T1.15@80.772,23.184
NetR5_1: R5.1 U4.1 | length 1.1
  Top w0.254: R5.1@70.817,59.614 R5.1@70.817,59.614 U4.1@71.896,59.614
NetR6_2: R6.2 T2.48 | length 2
  Top w0.254: R6.2@73.198,21.666 T2.48@73.198,23.634
NetR7_2: R7.2 T2.45 | length 2
  Top w0.254: R7.2@70.138,21.666 T2.45@70.138,23.634
NetR8_2: R8.2 T2.42 | length 1.8
  Top w0.254: R8.2@67.078,21.881 T2.42@67.078,23.634
NetR9_2: R9.2 T2.39 | length 1.8
  Top w0.254: R9.2@64.018,21.869 T2.39@64.018,23.634
NetR10_2: R10.2 T2.36 | length 1.8
  Top w0.254: R10.2@60.958,21.861 T2.36@60.958,23.634
NetR11_2: R11.2 T2.33 | length 1.8
  Top w0.254: R11.2@57.898,21.873 T2.33@57.898,23.634
NetR12_2: R12.2 T2.30 | length 1.7
  Top w0.254: R12.2@54.838,21.885 T2.30@54.838,23.634
NetR13_2: R13.2 T2.27 | length 1.7
  Top w0.254: R13.2@51.778,21.897 T2.27@51.778,23.634
NetR14_2: R14.2 T3.48 | length 1.7
  Top w0.254: R14.2@44.75,21.953 T3.48@44.75,23.634
NetR15_2: R15.2 T3.45 | length 1.7
  Top w0.254: R15.2@41.69,21.965 T3.45@41.69,23.634
NetR16_2: R16.2 T3.42 | length 1.7
  Top w0.254: R16.2@38.63,21.977 T3.42@38.63,23.634
NetR17_2: R17.2 T3.39 | length 1.7
  Top w0.254: R17.2@35.57,21.978 T3.39@35.57,23.634
NetR18_2: R18.2 T3.36 | length 1.7
  Top w0.254: R18.2@32.51,21.966 T3.36@32.51,23.634
NetR19_2: R19.2 T3.33 | length 1.7
  Top w0.254: R19.2@29.45,21.954 T3.33@29.45,23.634
NetR20_2: R20.2 T3.30 | length 1.7
  Top w0.254: R20.2@26.39,21.942 T3.30@26.39,23.634
NetR21_2: R21.2 T3.27 | length 1.7
  Top w0.254: R21.2@23.33,21.93 T3.27@23.33,23.634
NetR24_1: R24.1 R26.2 U1.3 | length 2.6
  Top w0.3: U1.3@7.874,51.778 R24.1@7.874,50.14 R26.2@8.788,50.14
NetR30_1: R30.1 U4.3 | length 1.1
  Top w0.254: R30.1@70.817,57.734 R30.1@70.817,57.734 U4.3@71.896,57.734
NetR32_1: R32.1 U2.4 | length 1.1
  Top w0.3: U2.4@124.13,23.749 R32.1@124.13,24.892
PORST_N: R5.2 U3.73 | length 13.6
  Top w0.254: U3.73@56.376,59.888 v1(60.802,59.888) ; v1(66.136,59.888) 69.627,59.888 R5.2@69.902,59.614
  Bottom w0.254: v1(60.802,59.888) v1(66.136,59.888)
RXD3: P1.5 U3.65 | length 102.2
  Top w0.254: U3.65@56.376,63.088 v1(60.813,63.088) ; v1(66.161,63.088) 108.159,63.088 132.486,38.76 132.486,27.051 134.239,25.298 P1.5@136.017,25.298
  Bottom w0.254: v1(60.813,63.088) v1(66.161,63.088)
SSUSB_RX_N: CMK3.1 U3.19 | length 100.3
  Top w0.203: v1(54.356,81.575) 54.504,81.723 55.039,81.723 55.274,81.488 U3.19@56.376,81.488 ; v1(113.928,22.352) 113.779,22.204 113.779,20.585 114.014,20.35 CMK3.1@114.014,19.873
  Bottom w0.203: v1(54.356,81.575) 54.208,81.723 53.656,81.723 53.213,81.28 53.213,78.613 55.753,76.073 72.857,76.073 113.779,35.151 113.779,22.5 v1(113.928,22.352)
SSUSB_RX_P: CMK3.2 U3.17 | length 100.8
  Top w0.203: v1(54.356,82.202) 54.504,82.053 55.04,82.053 55.274,82.288 U3.17@56.376,82.288 ; CMK3.2@113.214,19.873 113.214,20.35 113.449,20.585 113.449,22.204 v1(113.301,22.352)
  Bottom w0.203: v1(54.356,82.202) 54.208,82.053 53.519,82.053 52.883,81.417 52.883,78.476 55.616,75.743 72.72,75.743 113.449,35.014 113.449,22.5 v1(113.301,22.352)
SSUSB_TX_N: C44.2 U3.15 | length 100.4
  Top w0.203: v1(54.229,83.175) 54.377,83.323 55.04,83.323 55.274,83.088 U3.15@56.376,83.088 ; v1(111.553,24.384) 111.404,24.236 111.404,23.56 111.709,23.255 C44.2@111.709,22.904
  Bottom w0.203: v1(54.229,83.175) 54.081,83.323 53.224,83.323 51.816,81.915 51.816,74.93 55.423,71.323 74.305,71.323 111.404,34.224 111.404,24.532 v1(111.553,24.384)
SSUSB_TX_P: C43.2 U3.13 | length 100.9
  Top w0.203: v1(54.229,83.802) 54.377,83.653 55.04,83.653 55.274,83.888 U3.13@56.376,83.888 ; C43.2@110.769,22.904 110.769,23.255 111.074,23.56 111.074,24.236 v1(110.926,24.384)
  Bottom w0.203: v1(54.229,83.802) 54.081,83.653 53.087,83.653 51.486,82.052 51.486,74.793 55.286,70.993 74.168,70.993 111.074,34.087 111.074,24.532 v1(110.926,24.384)
TXD3: P1.4 U3.67 | length 103.7
  Top w0.254: U3.67@56.376,62.288 v1(60.826,62.288) ; v1(66.16,62.288) 107.827,62.288 131.686,38.429 131.686,25.311 134.239,22.758 P1.4@136.017,22.758
  Bottom w0.254: v1(60.826,62.288) v1(66.16,62.288)
UART_RXD1: P1.2 U3.71 | length 107.6
  Top w0.254: U3.71@56.376,60.688 v1(60.826,60.688) ; v1(66.16,60.688) 107.165,60.688 130.086,37.766 130.086,20.459 132.867,17.678 P1.2@136.017,17.678
  Bottom w0.254: v1(60.826,60.688) v1(66.16,60.688)
UART_TXD1: P1.3 U3.69 | length 105.9
  Top w0.254: U3.69@56.376,61.488 v1(60.813,61.488) ; v1(66.162,61.488) 107.496,61.488 130.886,38.098 130.886,22.479 133.147,20.218 P1.3@136.017,20.218
  Bottom w0.254: v1(60.813,61.488) v1(66.162,61.488)
USB_0_N: CMK2.3 U3.23 | length 97.1
  Top w0.203: U3.23@56.376,79.888 57.478,79.888 57.713,79.653 58.547,79.653 58.674,79.78 v1(58.674,79.802) ; v1(118.423,19.812) 118.275,19.664 118.275,19.163 118.51,18.928 CMK2.3@118.51,18.451
  Bottom w0.203: v1(58.674,79.802) 58.822,79.653 73.087,79.653 118.275,34.465 118.275,19.96 v1(118.423,19.812)
USB_0_P: CMK2.4 U3.25 | length 96.5
  Top w0.203: U3.25@56.376,79.088 57.478,79.088 57.713,79.323 58.547,79.323 58.674,79.196 v1(58.674,79.175) ; CMK2.4@117.71,18.451 117.71,18.927 117.945,19.162 117.945,19.664 v1(117.797,19.812)
  Bottom w0.203: v1(58.674,79.175) 58.822,79.323 72.95,79.323 117.945,34.328 117.945,19.96 v1(117.797,19.812)
USB_1_N: CMK4.3 U3.61 | length 77.4
  Top w0.203: U3.61@56.376,64.688 57.478,64.688 57.713,64.453 58.399,64.453 v1(58.547,64.602) ; v1(100.135,19.685) 99.987,19.537 99.987,18.909 100.222,18.674 CMK4.3@100.222,18.197
  Bottom w0.203: v1(58.547,64.602) 58.695,64.453 77.873,64.453 99.987,42.339 99.987,19.833 v1(100.135,19.685)
USB_1_P: CMK4.4 U3.63 | length 76.8
  Top w0.203: U3.63@56.376,63.888 57.478,63.888 57.713,64.123 58.399,64.123 v1(58.547,63.975) ; CMK4.4@99.422,18.197 99.422,18.673 99.657,18.908 99.657,19.537 v1(99.509,19.685)
  Bottom w0.203: v1(58.547,63.975) 58.695,64.123 77.736,64.123 99.657,42.202 99.657,19.833 v1(99.509,19.685)
USB_5V: D7.2 FB1.1 FB2.1 | length 27.8
  Top w1.143: FB2.1@105.029,15.062 FB1.1@106.553,15.062 ; 105.893,14.859 105.893,11.223 111.909,5.207 120.142,5.207 122.174,7.239 D7.2@122.174,10.287
VCC_WIFI6: C35.1 C36.1 C45.2 L3.1 R22.1 R30.2 U3.1 U3.3 U3.5 U3.7 U3.9 U3.93 U3.95 U3.97 U3.99 U4.5 | length 90.4
  Top w0.3: R22.1@58.699,57.607 63.398,57.607 ; 63.398,59.106 68.097,59.106 68.529,58.674 C45.2@69.908,58.674 ; v1(69.126,57.721) R30.2@69.888,57.721 ; R30.2@69.926,57.76 C45.2@69.926,58.522 ; v1(73.797,59.624) U4.5@74.906,59.624
  Top w4: 57.201,89.281 57.485,88.997 57.885,88.597 58.285,88.197 63.398,83.083 63.398,59.106 63.398,54.269 60.203,51.074
  Top w4.5: 30.963,91.821 35.763,91.821 43.637,91.821 46.736,91.821 47.904,92.989 54.508,92.989 57.201,90.297 57.201,89.281
  Bottom w0.3: v1(69.126,57.721) 71.029,59.624 v1(73.797,59.624)
VIN: C27.1 C28.1 C29.1 C30.2 C38.2 C39.1 D2.2 R24.2 R32.2 U1.2 U2.5 | length 121.5
  Top w0.254: U2.5@123.791,22.733 124.206,22.733 125.044,23.571 R32.2@125.044,24.892
  Top w0.8: D2.2@10.897,30.678 117.15,30.678 120.777,27.051 C38.2@120.777,22.758 ; C38.2@120.904,22.733 122.428,22.733 U2.5@123.791,22.733
WDI: R31.2 U4.4 | length 4.1
  Top w0.3: R31.2@70.79,56.794 R31.2@70.817,56.794 73.719,56.794 U4.4@74.579,57.654
WDT_RST_N: C26.2 R22.2 R23.2 U3.81 | length 107.9
  Top w0.3: U3.81@56.376,56.688 58.699,56.688 v1(59.492,56.688) ; v1(67.315,56.688) 67.945,56.058 110.617,56.058 129.362,37.313 129.362,19.863 130.835,18.39 130.835,12.065 R23.2@130.835,11.049
  Bottom w0.3: v1(59.492,56.688) v1(67.315,56.688)
pads on no net: RJ1. RJ2. U3.0@53.026,48.588 U3.0@53.026,89.588 U3.27 U3.59 U3.79 WDT_RST.0

## Polygon pours and split planes (outlines as drawn)
GND on Top "Top Layer-No Net" (solid, remove dead copper, pour order 0): 0,100 140,100 140,0 0,0
GND on Bottom "Top Layer-No Net" (solid, remove dead copper, pour order 2): 0,100 140,100 140,0 139.975,0.025 0,0.025

## Keep-outs
Keep-Out Layer:
  the board outline again, w0.203

## Other copper
Top:
  rectangle net GND: 131.191,42.418 139.065,44.323
  rectangle net GND: 134.493,38.989 136.398,47.117
  rectangle net GND: 134.366,90.678 136.144,98.679
  rectangle net GND: 131.699,94.107 139.065,96.139
  region net +3.3V: 10.541,70.079 10.541,68.631 11.354,67.818 14.224,67.818 15.037,68.631 15.037,70.079
  pour cut-out: 18.036,35.255 92.776,35.255 92.776,-0.025 18.085,-0.025 18.059,0
  region net VCC_WIFI6: 55.194,49.251 55.372,49.073 60.274,49.073 61.239,50.038 61.239,52.197 55.347,52.197 55.194,52.045
  region net VCC_WIFI6: 54.94,89.383 54.94,85.598 55.372,85.166 58.598,85.166 59.436,86.004 59.436,89.408
  region net NetC23_1: 5.69,56.642 5.842,56.794 5.842,61.062 6.858,62.078 6.858,72.009 6.35,72.517 2.896,72.517 2.337,71.958 2.337,57.429 3.124,56.642
  region net VIN: 6.325,52.756 6.883,52.756 7.315,52.324 7.315,48.87 7.95,48.235 7.95,47.828 7.341,47.219 5.309,47.219 5.309,50.114 5.969,50.775 5.969,52.451
  region net VIN: 12.751,28.651 13.106,29.007 13.106,39.916 7.95,45.072 7.95,48.235 5.829,48.235 5.309,47.714 5.309,42.113 7.95,39.472 7.95,29.413 8.712,28.651
  region net +9V~24V: 12.192,10.668 13.233,11.709 13.233,25.019 12.598,25.654 9.322,25.654 8.534,24.867 8.534,17.602 7.137,16.205 7.137,11.659 8.128,10.668
  region net +5V: 125.349,19.05 125.349,9.295 125.754,8.89 127.635,8.89 127.889,9.144 127.889,19.05 127.508,19.431 125.73,19.431
  region net NetC37_2: 124.562,22.073 124.46,22.174 122.885,22.174 122.174,21.463 122.174,16.129 122.301,16.002 124.333,16.002 124.562,16.231
Bottom:
  rectangle net GND: 134.366,91.44 136.144,98.679
  rectangle net GND: 131.445,42.418 138.811,44.45
  rectangle net GND: 134.493,39.243 136.398,46.609
  rectangle net GND: 131.953,94.107 138.811,96.012
  pour cut-out: 18.036,35.179 92.776,35.179 92.776,-0.025 18.085,-0.025 18.059,0

## Silkscreen, mask and mechanical layers (free items; w line width, h text height)
Silkscreen Top:
  text "N1" at 129.616,94.615 h2
  text "HLK_RM60_KIT_V1.1" at 3.048,88.113 h3
  text "20210325" at 8.026,84.785 h3
  text "HOLD" at 120.65,76.962 h3
  text "WP" at 120.65,74.549 h3
  text "DI" at 120.65,72.009 h3
  text "DO" at 120.65,69.469 h3
  text "CLK" at 120.65,66.929 h3
  text "CS" at 120.65,64.389 h3
  text "GND" at 120.65,61.849 h3
  text "N2" at 129.667,42.723 h2
  text "3.3V" at 128.943,26.924 h3
  text "RX3" at 129.442,24.384 h3
  text "TX3" at 129.592,21.844 h3
  text "TX1" at 129.964,19.304 h3
  text "RX1" at 129.814,16.764 h3
  text "GND" at 128.651,14.224 h3
  text "+9V~24V" at 4.318,2.54 h3 r90

## Text inside footprints (layer, text, board x,y; h text height)
U3: Silkscreen Top "99" at 56.757,48.937 h1.3 r270; Silkscreen Top "100" at 51.042,48.937 h1.3 r270; Silkscreen Top "1" at 56.757,89.577 h1.3 r270; Silkscreen Top "2" at 51.042,89.704 h1.3 r270